# Altium PCB TX.PcbDoc (part 1 of 2)
Units mm, origin at the board's own origin, x right, y up, seen from the top; angles counter-clockwise.
Board outline 57 x 59.5 mm, 4 copper layers (Top Layer, Top Inner Layer, Bottom Inner Layer, Bottom Layer), stack 0.603 mm thick; 71 components, 52 nets, 363 pads, 52 vias.
Unrouted connection lines stored in the file: 5.
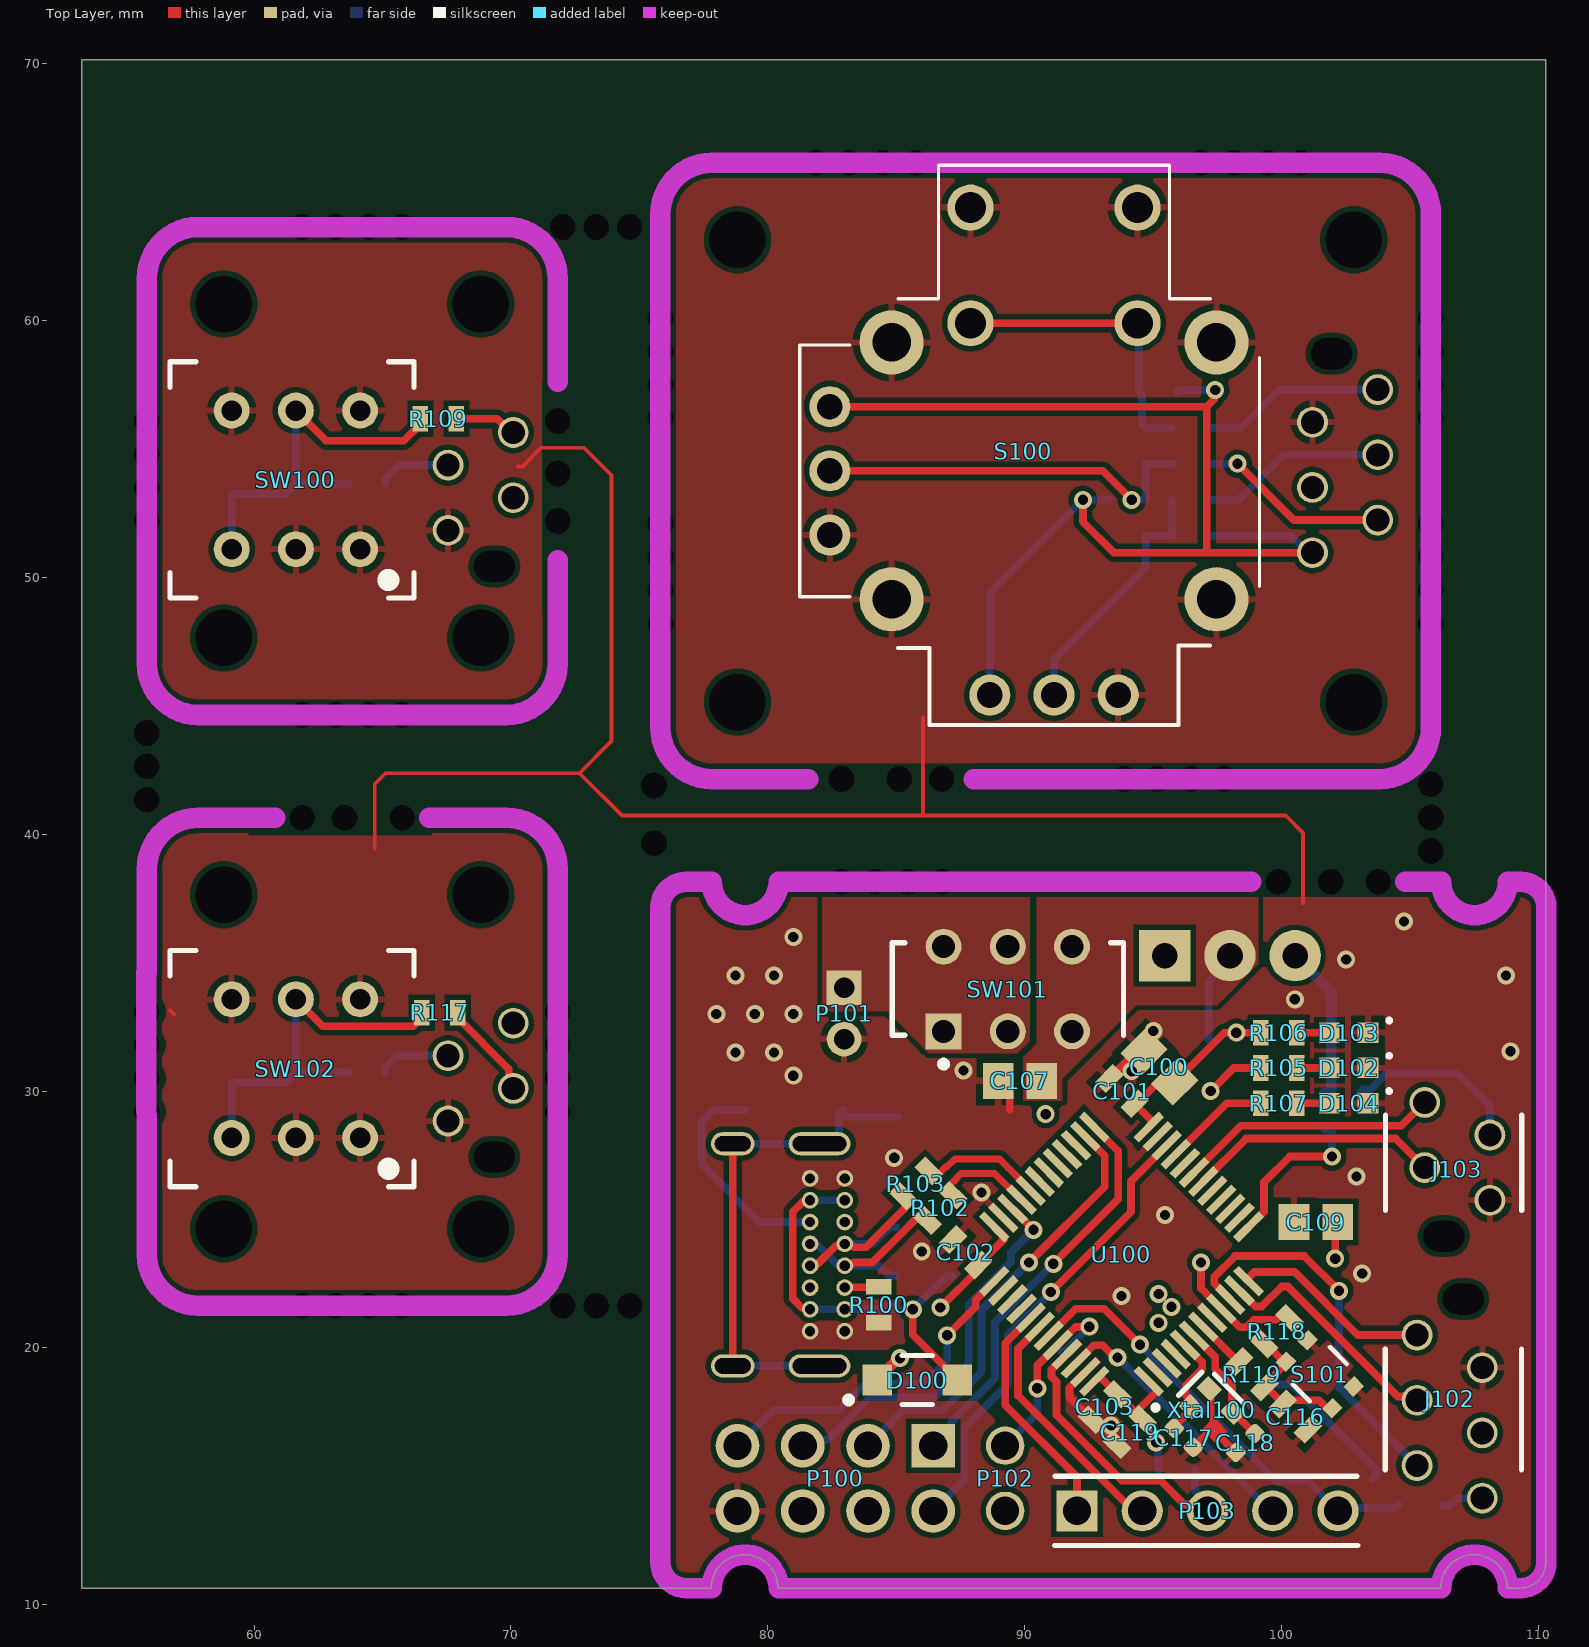
[diagram p0: Top Layer view]
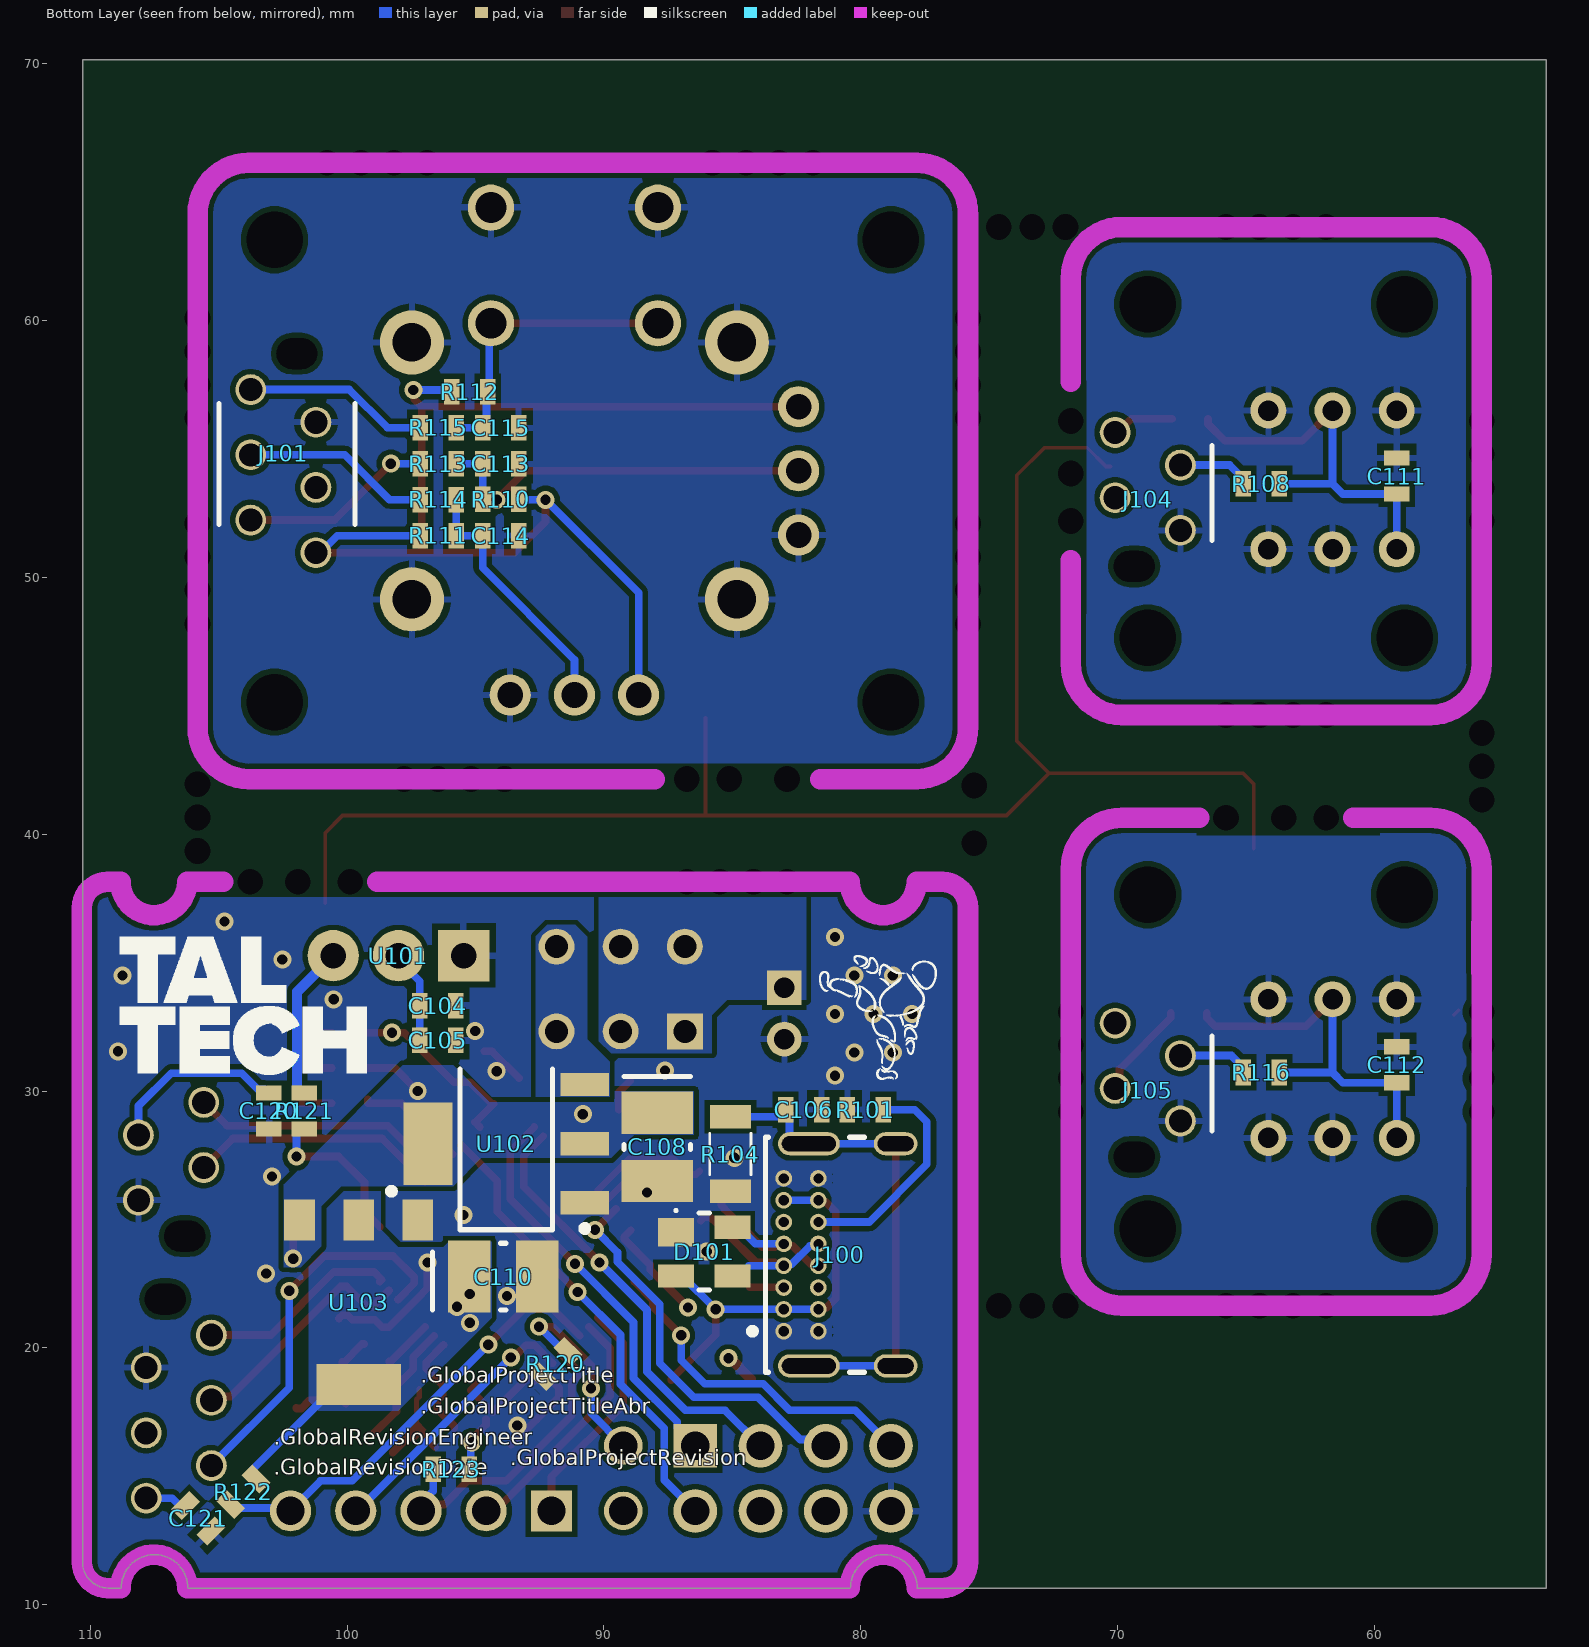
[diagram p1: Bottom Layer view, seen from below]
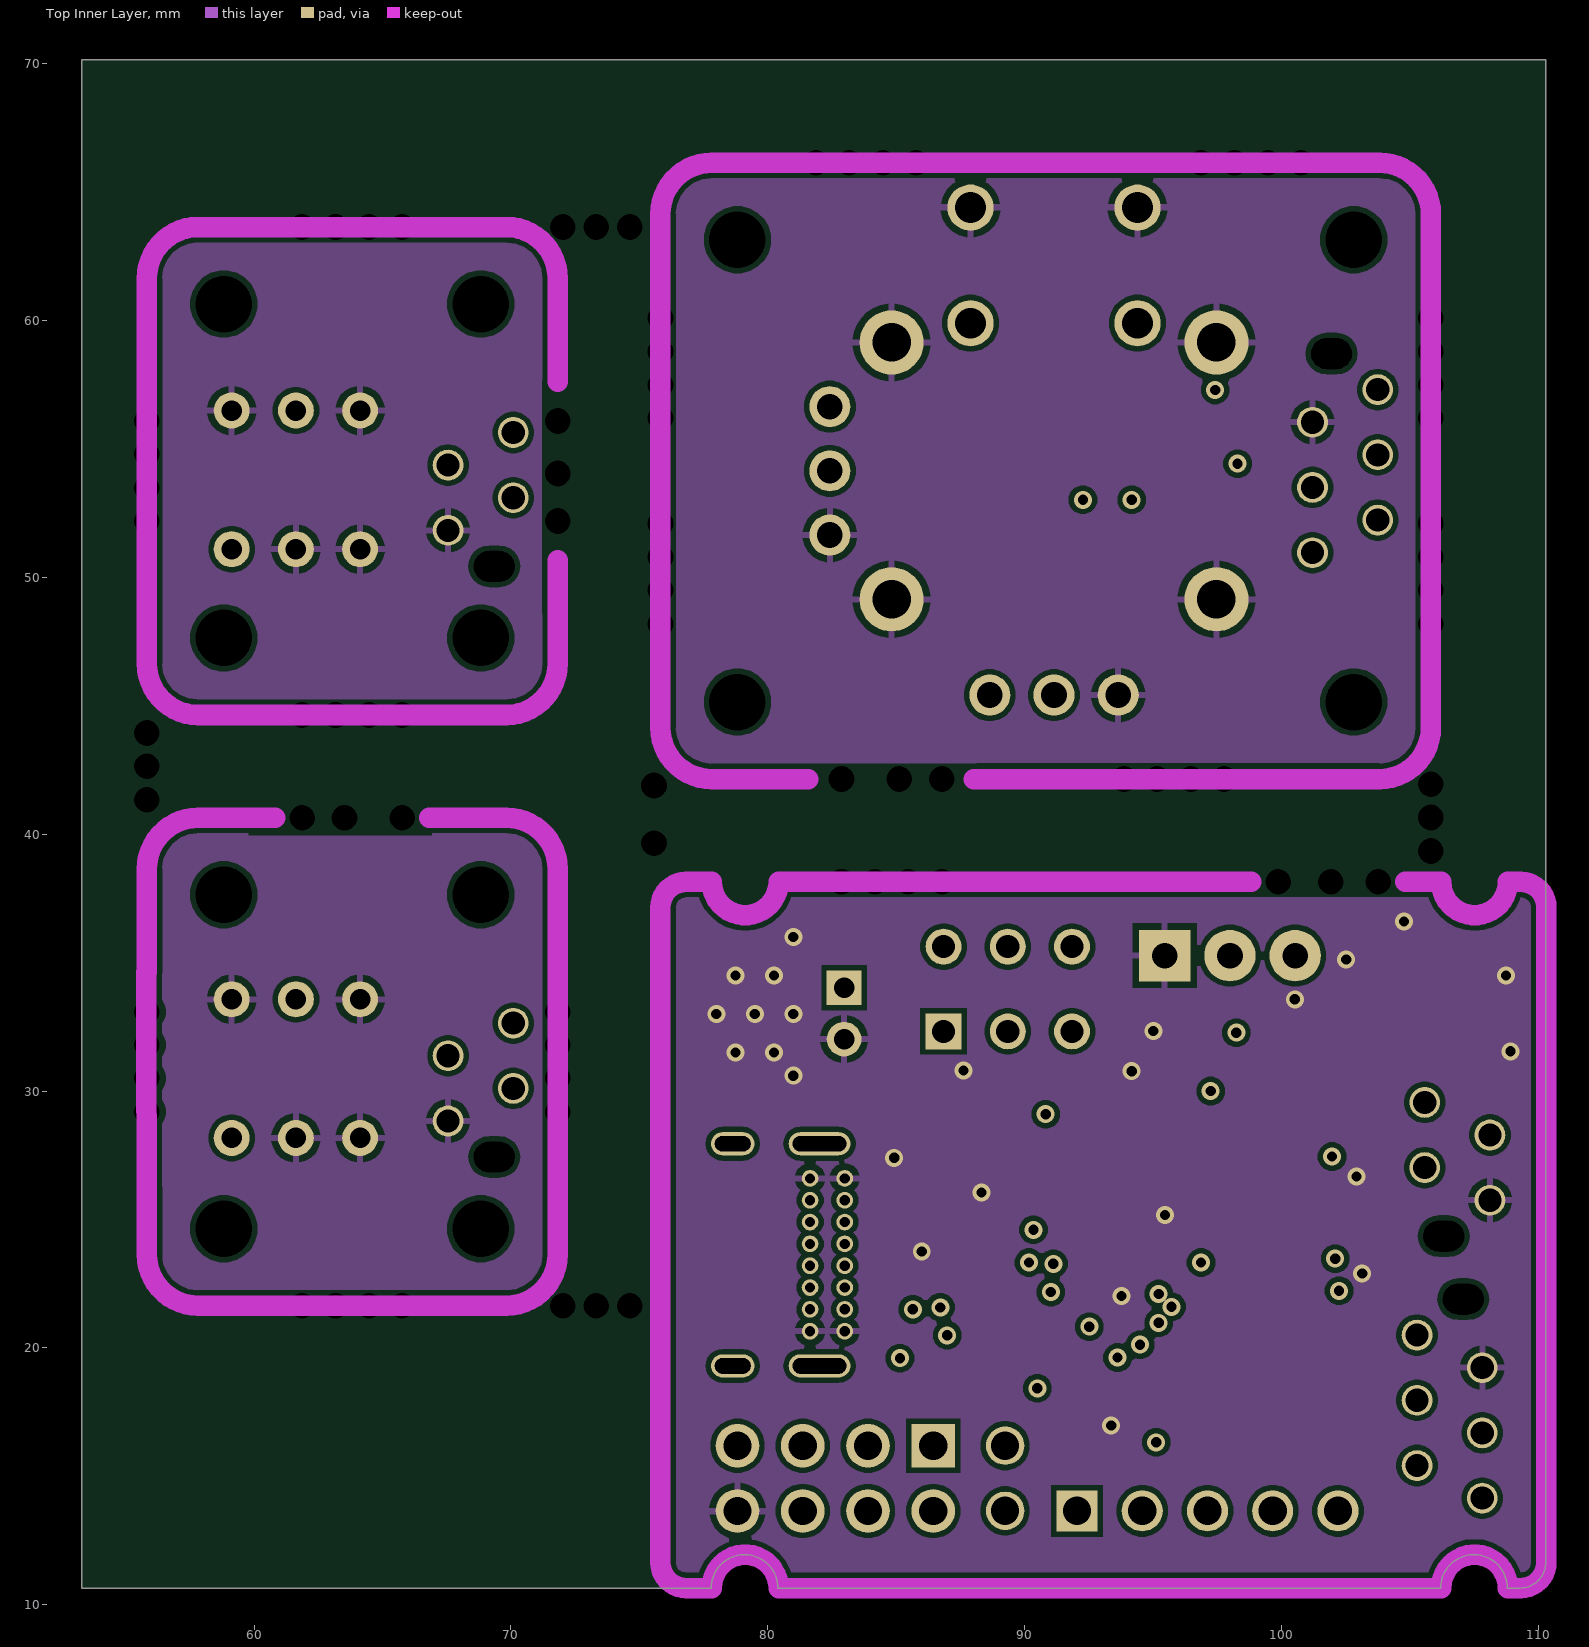
[diagram p2: Top Inner Layer]
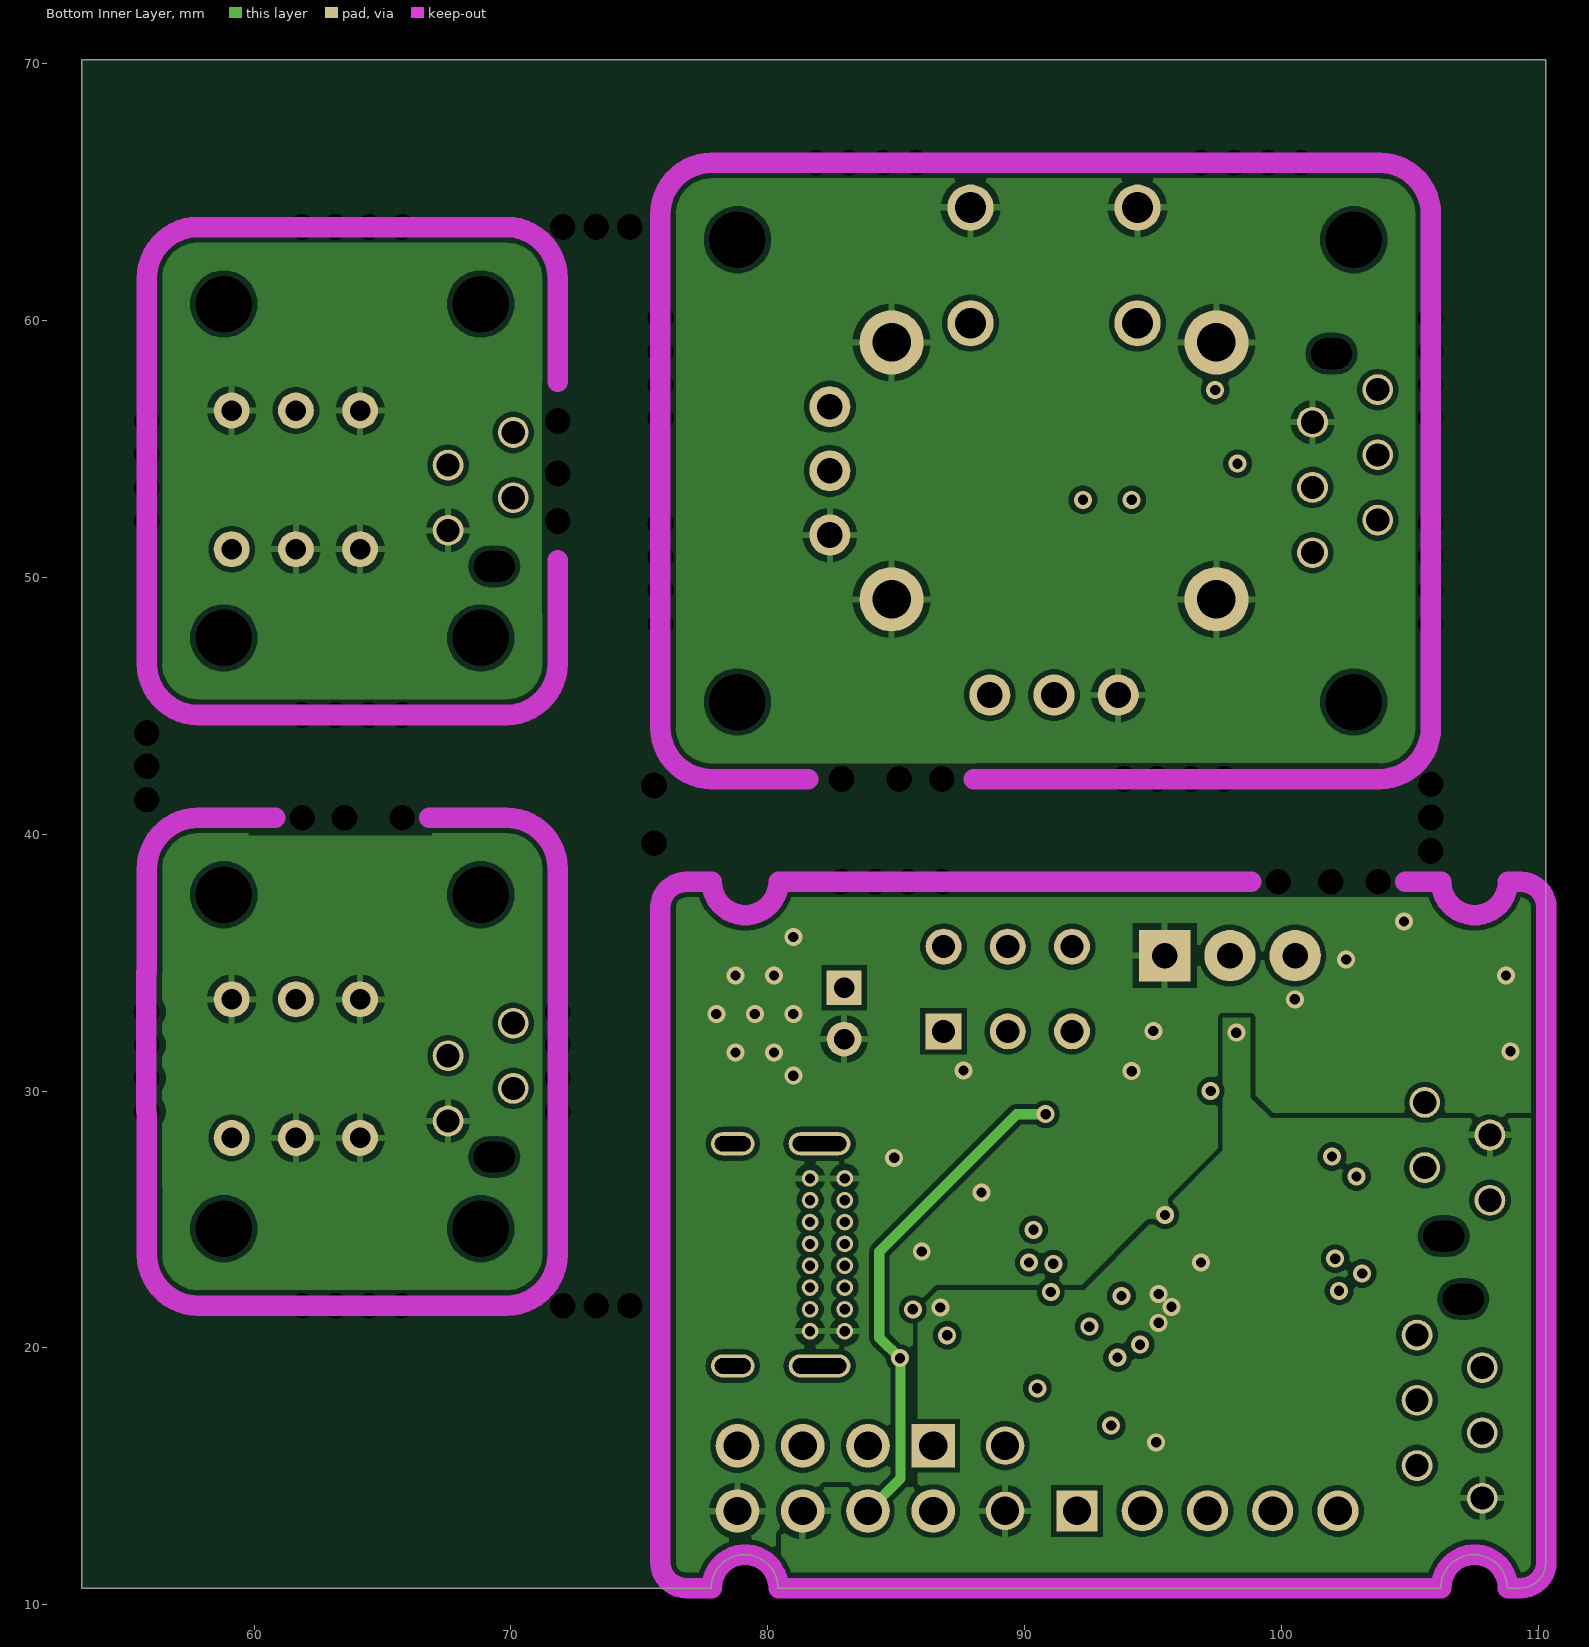
[diagram p3: Bottom Inner Layer]

## Layer stack, top to bottom
Top Solder: solder mask 0.0102, Solder Resist, Dk 3.5
Top Layer: signal copper 0.0356
Dielectric 2: prepreg 0.0711, PP-006, Dk 4.1
Top Inner Layer: signal copper 0.035
Dielectric 1: dielectric 0.32, FR-4, Dk 4.8
Bottom Inner Layer: signal copper 0.035
Dielectric 3: prepreg 0.0711, PP-006, Dk 4.1
Bottom Layer: signal copper 0.0356
Bottom Solder: solder mask 0.0102, Solder Resist, Dk 3.5

## Board outline
53.3,10.65 76.8,10.65 77.8,10.65 cw(c79.1,10.65) 80.4,10.65 106.2,10.65 cw(c107.5,10.65) 108.8,10.65 109.3,10.65 ccw(c109.3,11.65) 110.3,11.65 110.3,70.15 53.3,70.15

## Design rules (kind name [scope] priority, off if disabled: settings)
BoardOutlineClearance RouteToolBoard [(AsMM(HoleDiameter)=1) AND (AsMM(PadXSize_AllLayers)=0)] p1: gap=0 ignorepadtopadclearanceinfootprint=FALSE
BoardOutlineClearance BoardOutlineClearance_1 [All] p2: gap=0.254 ignorepadtopadclearanceinfootprint=FALSE except(0: Arc-SplitContinuation Track-SplitContinuation SMDPad-SplitContinuation THPad-SplitContinuation Via-SplitContinuation Fill-SplitContinuation Poly-SplitContinuation Region-SplitContinuation Text-SplitContinuation)
Clearance RouteToolClearance [All vs (AsMM(HoleDiameter)=1) AND (AsMM(PadXSize_AllLayers)=0)] p1: gap=0 ignorepadtopadclearanceinfootprint=FALSE
Clearance Clearance_1 [All] p2: gap=0.2 ignorepadtopadclearanceinfootprint=FALSE
ComponentClearance FS1000A [All vs InComponent('U101')] p1: gap=0 collisioncheckmode=3 verticalgap=0 showdistances=FALSE donotcheckwithout3dbody=TRUE
ComponentClearance [All] p2: gap=0.254 collisioncheckmode=3 verticalgap=0.254 showdistances=FALSE
DiffPairsRouting [All] p1: maxlimit=0.3 minlimit=0.127 mostfreqgap=0.127 toplayer_minwidth=0.12 toplayer_maxwidth=0.3 toplayer_prefwidth=0.12 midlayer1_maxgap=0.127 midlayer1_minwidth=0.111 midlayer1_maxwidth=0.111 midlayer1_prefwidth=0.111 midlayer2_maxgap=0.127 midlayer2_minwidth=0.111 midlayer2_maxwidth=0.111 midlayer2_prefwidth=0.111 bottomlayer_minwidth=0.12 bottomlayer_maxwidth=0.3 bottomlayer_prefwidth=0.12 impedanceprofiledriven=TRUE impedanceprofileid={F303A199-7218-468A-B388-033341A8378D} impedanceprofilevalue=90.000000 maxuncoupledlength=12.7
MinimumSolderMaskSliver [All] p1: minsoldermaskwidth=0
PolygonConnect MainPWR [IsNamedPolygon('Main')] p1: connectstyle=Direct reliefconductorwidth=1 reliefentries=2 polygonreliefangle="90 Angle" airgapwidth=0.254
PolygonConnect [All] p2: thpad.connectstyle=Relief thpad.reliefconductorwidth=0.254 thpad.reliefentries=4 thpad.polygonreliefangle="90 Angle" thpad.airgapwidth=0.254 smdpad.connectstyle=Relief smdpad.reliefconductorwidth=0.254 smdpad.reliefentries=4 smdpad.polygonreliefangle="90 Angle" smdpad.airgapwidth=0.254 via.connectstyle=Direct via.reliefconductorwidth=0.254 via.reliefentries=4 via.polygonreliefangle="90 Angle" via.airgapwidth=0.254
RoutingVias [All] p1: holewidth=0.3 width=0.5 viastyle="Through Hole" minholewidth=0.3 minwidth=0.5 maxholewidth=0.3 maxwidth=1 viatemplateguid#1={624E91B9-952A-4740-B797-111CA46E8F32} viatemplatename#1=v50h30
SilkToSolderMaskClearance [IsPad] p1: minsilkscreentomaskgap=0.1 clearancetoexposedcopper=TRUE
SolderMaskExpansion IsVia [IsVia] p1: expansion=0 istentingtop=FALSE soldermaskfromhole=TRUE
SolderMaskExpansion SolderMaskExpansion_1 [All] p2: expansion=0.102 istentingtop=FALSE
SupplyNets "Schematic Supply Nets_9" [InNet('SL_3V3')] p1: voltage=0.000
SupplyNets "Schematic Supply Nets_6" [InNet('J_3V3')] p2: voltage=0.000
SupplyNets "Schematic Supply Nets" [InNet('SR_3V3')] p3: voltage=0.000
SupplyNets "Schematic Supply Nets_5" [InNet('3V3')] p4: voltage=0.000
SupplyNets "Schematic Supply Nets_3" [InNet('5V')] p5: voltage=0.000
SupplyNets "Schematic Supply Nets_2" [InNet('7.4V')] p6: voltage=0.000
SupplyNets "Schematic Supply Nets_1" [InNet('GND')] p7: voltage=0.000
Width [All] p1: maxlimit=2 minlimit=0.15 preferedwidth=0.3 minimp=50.000000 maximp=50.000000 favimp=50.000000
26 further rules are at their usual default settings.

## Classes and differential pairs
differential pair D: +D_P -D_N
differential pair USB_D: +USB_D_P -USB_D_N

## Components (designator, comment, footprint, x,y, rotation, side; value= is the part's Value field where it differs from the comment)
C100 "4.7u" MLCC_0805_M 95.25,30.95 r315 top value=4.7µF
C101 "100n" MLCC_0603_M 93.8,30 r135 top value=100nF
C102 "100n" MLCC_0603_M 87.705,23.72 r135 top value=100nF
C103 "100n" MLCC_0603_M 93.125,17.7 r225 top value=100nF
C104 "1u" MLCC_0603_M 96.475,33.325 r0 bottom value=1µF
C105 "100n" MLCC_0603_M 96.475,31.975 r0 bottom value=100nF
C106 "1n" MLCC_0603_M 82.225,29.275 r0 bottom value=1nF
C107 "10u" MLCC_0805_M 89.825,30.4 r0 top value=10µF
C108 "TCJB226M025R0150" 1210_Tantalum 87.925,27.825 r270 bottom value=22µF
C109 "10u" MLCC_0805_M 101.35,24.9 r0 top value=10µF
C110 "TCJB226M025R0150" 1210_Tantalum 93.925,22.775 r180 bottom value=22µF
C111 "100n" MLCC_0603_M 59.13,53.95 r270 bottom value=100nF
C112 "100n" MLCC_0603_M 59.13,31.025 r270 bottom value=100nF
C113 "100n" MLCC_0603_M 94.025,54.425 r0 bottom value=100nF
C114 "100n" MLCC_0603_M 94.025,51.625 r0 bottom value=100nF
C115 "100n" MLCC_0603_M 94.025,55.825 r0 bottom value=100nF
C116 "100n" MLCC_0603_M 100.55,17.325 r135 top value=100nF
C117 "15p" MLCC_0402_M 96.2,16.5 r135 top value=15pF
C118 "15p" MLCC_0402_M 98.6,16.3 r45 top value=15pF
C119 "100n" MLCC_0603_M 94.1,16.725 r45 top value=100nF
C120 "100n" MLCC_0603_M 103.05,29.225 r90 bottom value=100nF
C121 "100n" MLCC_0603_M 105.795,13.37 r45 bottom value=100nF
D100 "MBR1020VL_R1_00001" FP-MBR1020VL_R1_00001-MFG 85.825,18.75 r0 top
D101 "SP0503BAHT" LFUS-SOT143-4_V 86.1,23.75 r180 bottom value=30pF
D102 "Red" "0603 RED LED" 102.625,30.9 r0 top
D103 "Red" "0603 RED LED" 102.625,32.275 r0 top
D104 "Red" "0603 RED LED" 102.625,29.525 r0 top
J100 "USB4085-GF-A" FP-USB4085-GF-A-MFG 78.975,23.625 r90 bottom locked
J101 "7-215079-6" 7-215079-6-Footprint-1 101.215,50.965 r90 bottom
J102 "7-215079-6" 7-215079-6-Footprint-1 107.825,14.15 r90 top
J103 "7-215079-4" 7-215079-4 105.585,29.56 r270 top
J104 "7-215079-4" 7-215079-4 70.095,55.645 r270 bottom
J105 "7-215079-4" 7-215079-4 70.095,32.645 r270 bottom
P100 "8 Pos Vertical Pin Header" "8 POS Vertical Pin Header" 82.635,14.92 r180 top
P101 "S2B-PH-K-S(LF)(SN)" B5B-PH-K-S(LF)(SN) 82.425,33.025 r270 top
P102 "PH1-02-UA" "2Pos Pin Header Vertical" 89.245,14.925 r90 top
P103 "61300511121" 61300511121 97.125,13.655 r0 top
R100 "5.1k" Resistor_0603_M 84.325,21.675 r270 top value=5,1k
R101 "5.1k" Resistor_0603_M 79.825,29.275 r180 bottom value=5,1k
R102 "22R" Resistor_0603_M 86.725,25.45 r45 top value=22
R103 "22R" Resistor_0603_M 85.775,26.4 r45 top value=22
R104 "1M" Resistor_1206_M 85.075,27.55 r90 bottom
R105 "200R" Resistor_0603_M 99.9,30.9 r0 top value=200
R106 "200R" Resistor_0603_M 99.9,32.275 r0 top value=200
R107 "200R" Resistor_0603_M 99.9,29.525 r0 top value=200
R108 "10k" Resistor_0603_M 64.405,53.65 r0 bottom
R109 "100R" Resistor_0603_M 67.18,56.175 r0 top value=100
R110 "10k" Resistor_0603_M 94.025,53.05 r180 bottom
R111 "10k" Resistor_0603_M 96.45,51.625 r0 bottom
R112 "10k" Resistor_0603_M 95.225,57.225 r0 bottom
R113 "100R" Resistor_0603_M 96.45,54.425 r0 bottom value=100
R114 "100R" Resistor_0603_M 96.45,53.025 r0 bottom value=100
R115 "100R" Resistor_0603_M 96.45,55.825 r0 bottom value=100
R116 "10k" Resistor_0603_M 64.405,30.725 r0 bottom
R117 "100R" Resistor_0603_M 67.23,33.05 r0 top value=100
R118 "10k" Resistor_0603_M 99.825,20.65 r45 top
R119 "100R" Resistor_0603_M 98.85,18.975 r135 top value=100
R120 "10k" Resistor_0603_M 91.9,19.375 r135 bottom
R121 "22R" Resistor_0603_M 101.675,29.225 r270 bottom value=22
R122 "4.7k" Resistor_0603_M 104.05,14.4 r135 bottom value=4,7k
R123 "4.7k" Resistor_0603_M 95.95,15.275 r180 bottom value=4,7k
S100 "THB001P" THB001P 91.15,54.15 r0 top value=10kR
S101 "USLPT2819DT4TR" USLPT2819DT4TR-Footprint-1 101.5,18.975 r315 top
SW100 "TL2201EEXB" TL2201EEXB-Footprint-1 61.63,53.8 r180 top
SW101 "JS202011CQN" FP-JS202011CQN-MFG 89.35,33.975 r0 top
SW102 "TL2201EEXB" TL2201EEXB-Footprint-1 61.63,30.875 r180 top
U100 "STM32F103C6T6A" STM-LQFP48_M 93.775,23.65 r135 top
U101 "FS1000A" "2.54mm 3-pin horizontal" 98,40.475 r0 bottom
U102 "AMS1117-5.0" SOT230P700X180-4N 93.8,27.95 r0 bottom
U103 "AMS1117-3.3" "SOT-223 based on ZVP2110GTA" 99.55,21.775 r270 bottom
Xtal100 "ABM11-16.000MHZ-12-N1G-T" FP-ABM11-MFG 97.3,17.6 r315 top

## Footprints (in the part's own frame and the unit in brackets; to place one, negate y for a bottom-side part, rotate by r counter-clockwise, add the part's x,y. Pads: shape width x height; smd on the part's side, far side on the other; paste and mask are expansions set on the pad)
"2.54mm 3-pin horizontal" [mm]
  rect 2x2 hole 1: 1(-2.54,5.2)
  round 2 hole 1: 2(0,5.2) 3(2.54,5.2)
"2Pos Pin Header Vertical" [mm]
  round 1.5 hole 1.1: 1(-1.27,0) 2(1.27,0)
  body extent -2.55,-1.25 2.54,1.25, height 7.25
7-215079-4 [mm]
  round 0 hole 1.2 slot 1.6 at 90 deg unplated: 0(5.21,0.74)
  round 1.2 hole 0.9: 1(0,0) 2(1.27,2.54) 3(2.54,0) 4(3.81,2.54)
  silkscreen extent 0.5,-1.53 4.2,3.77, body extent -1.62,-1.39 5.42,3.61, height 4
7-215079-6-Footprint-1 [mm]
  round 0 hole 1.2 slot 1.6 at 90 deg unplated: 0(7.75,0.74)
  round 1.2 hole 0.9: 1(0,0) 2(1.27,2.54) 3(2.54,0) 4(3.81,2.54) 5(5.08,0) 6(6.35,2.54)
  silkscreen extent 1.1,-1.53 5.8,3.77, body extent -1.6,-1.38 7.96,3.62, height 4
"8 POS Vertical Pin Header" [mm]
  rect 1.7x1.7 hole 1.1: 1(-3.81,-1.27)
  round 1.7 hole 1.1: 2(-3.81,1.27) 3(-1.27,-1.27) 4(-1.27,1.27) 5(1.27,-1.27) 6(1.27,1.27) 7(3.81,-1.27) 8(3.81,1.27)
  body extent -5.08,-2.51 5.08,2.49, height 8.03
"0603 RED LED" [mm] "Generic 0603 RED LED"
  rect 0.8x0.8 smd: 1(0.75,0) 2(-0.75,0)
  silkscreen extent 1.55,0.45 1.6,0.5, body extent -0.8,-0.4 0.8,0.4, height 0.4
1210_Tantalum [mm] "Chip Capacitor, 2-Leads, Body 3,20x2,50mm, IPC Medium Density"
  rect 1.65x2.8 smd: 1(-1.325,0) 2(1.325,0)
  silkscreen extent -2.75,-1.3 0.1,1.3, body extent -1.85,-1.43 1.85,1.5, height 2.06
61300511121 [mm] "Pin Header, pitch 2.54 mm, THT, Vertical, single row, 5p"
  rect 1.6x1.6 hole 1.1: 1(-5.08,0)
  round 1.6 hole 1.1: 2(-2.54,0) 3(0,0) 4(2.54,0) 5(5.08,0)
  silkscreen extent -5.95,-1.35 5.85,1.35, body extent -6.35,-1.27 6.35,1.27, height 8.57
B5B-PH-K-S(LF)(SN) [mm]
  rect 1.35x1.35 hole 0.8: 1(-1,0.55)
  round 1.35 hole 0.8: 2(1,0.55)
  body extent -2.92,-5.73 2.98,1.87, height 4.8
FP-ABM11-MFG [mm]
  rect 0.75x0.65 smd paste+0 mask+0: 1(-0.65,-0.5) 3(0.65,0.5) 4(-0.65,0.5)
  round 0.025 smd paste+0 mask+0: 2(0.65,-0.525)
  Top Layer region: 0.275,-0.325 0.425,-0.175 1.025,-0.175 1.025,-0.825 0.275,-0.825
  silkscreen extent -1.31,-0.53 0.65,1.04, body extent -1.18,-0.97 1.18,0.97, height 0.25
FP-JS202011CQN-MFG [mm]
  rect 1.4x1.4 hole 0.9 paste-2539.97 mask+0: 1(-2.5,-1.65)
  round 1.4 hole 0.9 paste-2539.97 mask+0: 2(0,-1.65) 3(2.5,-1.65) 4(2.5,1.65) 5(0,1.65) 6(-2.5,1.65)
  silkscreen extent -4.5,-3.05 4.5,1.8, body extent -4.6,-2.45 4.6,2.45, height 0.25
FP-MBR1020VL_R1_00001-MFG [mm]
  rect 1.15x1.22 smd paste+0 mask+0: 1(-1.55,0) 2(1.55,0)
  silkscreen extent -2.8,-0.95 0.6,0.95, body extent -2.22,-1.05 2.22,1.05, height 0.25
FP-USB4085-GF-A-MFG [mm]
  rrect100% 0.9x2.4 hole 2.1 slot 0.6 at 0 deg paste-2539.97 mask+0: 1(-4.325,3.045) 2(4.325,3.045)
  rrect100% 0.9x1.7 hole 1.4 slot 0.6 at 0 deg paste-2539.97 mask+0: 3(-4.325,-0.335) 4(4.325,-0.335)
  round 0.65 hole 0.4 paste-2539.97 mask+0: A1(-2.975,4.025) A4(-2.125,4.025) A5(-1.275,4.025) A6(-0.425,4.025) A7(0.425,4.025) A8(1.275,4.025) A9(2.125,4.025) A12(2.975,4.025) B1(2.975,2.675) B4(2.125,2.675) B5(1.275,2.675) B6(0.425,2.675) B7(-0.425,2.675) B8(-1.275,2.675) B9(-2.125,2.675) B12(-2.975,2.675)
  silkscreen extent -4.57,0.89 4.57,5.37, body extent -4.51,-4.6 4.51,4.57, height 3.46
LFUS-SOT143-4_V [mm] "SOT143, 4-Leads, Body 3.04x1.4mm, Pitch 1.90mm"
  rect 1.4x1.1 smd: 1(-1.1,0.75)
  rect 1.4x0.9 smd: 2(-1.1,-0.95) 3(1.1,-0.95) 4(1.1,0.95)
  silkscreen extent -1.15,-1.5 0.2,1.65, body extent -0.7,-1.52 0.7,1.52, height 1.22
MLCC_0402_M [mm]
  rrect49% 0.63x0.61 smd: 1(-0.525,0) 2(0.525,0)
  body extent -0.5,-0.25 0.5,0.25, height 0.55
MLCC_0603_M [mm]
  rect 0.6x1 smd: 1(-0.7,0) 2(0.7,0)
  body extent -0.8,-0.4 0.8,0.4, height 0.92
MLCC_0805_M [mm] "Chip Capacitor, 2-Leads, Body 2,00x1,25mm, IPC Medium Density"
  rect 1.2x1.4 smd: 1(-0.85,0) 2(0.85,0)
  body extent -1.05,-0.67 1.05,0.67, height 1.35
Resistor_0603_M [mm]
  rect 0.6x1 smd: 1(-0.7,0) 2(0.7,0)
  body extent -0.8,-0.4 0.8,0.4, height 0.45
Resistor_1206_M [mm]
  rect 0.9x1.6 smd: 1(-1.45,0) 2(1.45,0)
  silkscreen extent -0.8,-0.8 0.8,0.8, body extent -1.6,-0.83 1.6,0.83, height 0.56
SOT230P700X180-4N [mm] "SOT-223 based on AP2114H-3.3TRG1"
  rect 1.9x0.9 smd: 1(-3.05,2.3) 2(-3.05,0) 3(-3.05,-2.3)
  rect 1.9x3.2 smd: 4(3.05,0)
  silkscreen extent -3.17,-2.9 1.8,3.42, body extent -3.5,-3.35 3.5,3.35, height 1.8
"SOT-223 based on ZVP2110GTA" [mm] "SOT-223 based on ZVP2110GTA"
  rect 1.6x1.2 smd: 1(-3.2,2.3) 2(-3.2,0) 3(-3.2,-2.3)
  rect 1.6x3.3 smd: 4(3.2,0)
  silkscreen extent -4.45,1.15 -4.2,1.4, body extent -3.5,-3.25 3.5,3.25, height 1.8
STM-LQFP48_M [mm] "QFP, 48-Leads, Body 7x7mm, Pitch 0.5mm, IPC Low Density"
  rect 1.4x0.3 smd: 1(-4.25,2.75) 2(-4.25,2.25) 3(-4.25,1.75) 4(-4.25,1.25) 5(-4.25,0.75) 6(-4.25,0.25) 7(-4.25,-0.25) 8(-4.25,-0.75) 9(-4.25,-1.25) 10(-4.25,-1.75) 11(-4.25,-2.25) 12(-4.25,-2.75) 25(4.25,-2.75) 26(4.25,-2.25) 27(4.25,-1.75) 28(4.25,-1.25) 29(4.25,-0.75) 30(4.25,-0.25) 31(4.25,0.25) 32(4.25,0.75) 33(4.25,1.25) 34(4.25,1.75) 35(4.25,2.25) 36(4.25,2.75)
  rect 0.3x1.4 smd: 13(-2.75,-4.25) 14(-2.25,-4.25) 15(-1.75,-4.25) 16(-1.25,-4.25) 17(-0.75,-4.25) 18(-0.25,-4.25) 19(0.25,-4.25) 20(0.75,-4.25) 21(1.25,-4.25) 22(1.75,-4.25) 23(2.25,-4.25) 24(2.75,-4.25) 37(2.75,4.25) 38(2.25,4.25) 39(1.75,4.25) 40(1.25,4.25) 41(0.75,4.25) 42(0.25,4.25) 43(-0.25,4.25) 44(-0.75,4.25) 45(-1.25,4.25) 46(-1.75,4.25) 47(-2.25,4.25) 48(-2.75,4.25)
  silkscreen extent -5.26,3.19 -5.06,3.39, body extent -3.5,-3.5 3.5,3.5, height 1.6
THB001P [mm]
  round 1.8 hole 1.2: B1A(-3.25,10.25) B1B(3.25,10.25) B2A(-3.25,5.75) B2B(3.25,5.75)
  round 1.6 hole 1: H1(-2.5,-8.73) H2(0,-8.73) H3(2.5,-8.73) V1(-8.73,2.5) V2(-8.73,0) V3(-8.73,-2.5)
  round 2.5 hole 1.5: S1(-6.325,5) S2(-6.325,-5) S3(6.325,-5) S4(6.325,5)
  silkscreen extent -9.9,-9.9 8,11.9, body extent -9.67,-9.67 7.6,11.6, height 19.5
TL2201EEXB-Footprint-1 [mm]
  round 1.4 hole 0.8: 1(-2.5,2.7) 2(0,2.7) 3(2.5,2.7) 4(-2.5,-2.7) 5(2.5,-2.7) 6(0,-2.7)
  silkscreen extent -4.6,-4.6 4.9,4.6, body extent -4.25,-4.25 4.55,4.25, height 14.2
USLPT2819DT4TR-Footprint-1 [mm]
  rect 0.55x0.6 smd: 1(-1.275,0.6) 2(1.275,0.6) 3(-1.275,-0.59) 4(1.275,-0.59)
  silkscreen extent -0.46,-1.02 0.46,1.03, body extent -1.5,-0.94 1.5,0.96, height 0.43

## Part data
C100: library part CMP-001-1830-1, "MLCC, 0805, 4.7u, 20%, 50V, X5R", Capacitor Type=Ceramic, Case/Package=0805, Dielectric=X5R, Manufacturer=Any, Tolerance=20%, Voltage=50V, Mount=SMD, Part number="MLCC, 0805, 4.7u, 20%, 50V, X5R", RoHS=Yes
C101 C102 C103 C105 C111 C112 C113 C114 C115 C116 C119 C120 C121: library part CMP-001-0815-1, "MLCC, 0603, 100n, 10%, 50V, X7R", Capacitor Type=Ceramic, Case/Package=0603, Dielectric=X7R, Manufacturer=Any, Tolerance=10%, Voltage=50V, Mount=SMD, Part number="MLCC, 0603, 100n, 10%, 50V, X7R", RoHS=Yes
C104: library part CMP-001-0565-1, "MLCC, 0603, 1u, 10%, 50V, X5R", Capacitor Type=Ceramic, Case/Package=0603, Dielectric=X5R, Manufacturer=Any, Tolerance=10%, Voltage=50V, Mount=SMD, Part number="MLCC, 0603, 1u, 10%, 50V, X5R", RoHS=Yes
C106: library part CMP-001-0786-1, "MLCC, 0603, 1n, 10%, 50V, X7R", Capacitor Type=Ceramic, Case/Package=0603, Dielectric=X7R, Manufacturer=Any, Tolerance=10%, Voltage=50V, Mount=SMD, Part number="MLCC, 0603, 1n, 10%, 50V, X7R", RoHS=Yes
C107 C109: library part CMP-001-0829-2, "MLCC, 0805, 10u, 10%, 50V, X5R", Capacitor Type=Ceramic, Case/Package=0805, Dielectric=X5R, Manufacturer=Any, Tolerance=10%, Voltage=50V, Mount=SMD, Part number="MLCC, 0805, 10u, 10%, 50V, X5R", RoHS=Yes
C108 C110: library part CMP-0001-00036-4, "Cap Tant Solid 22uF 25V B CASE 20% (3.5 X 2.8 X 1.9mm) SMD 3528-21 0.15 Ohm 105°C T/R", Capacitance=22uF, Capacitor Type=Molded, Case Code (Imperial)=1210, Case Code (Metric)=3528, Dielectric=X5R, ESR (Equivalent Series Resistance)=150mR, Manufacturer="AVX Corporation", Max Operating Temperature=105°C, Min Operating Temperature=-55°C, Package Quantity=2000, Tolerance=20%, Voltage Rating=25V, Case/Package=1210, Depth=2.8mm, Features="General Purpose", Height=1.9mm, Height - Seated (Max)=0.083inch, Length=0.138inch, Life (Hours)=2000Hour, Mount="Surface Mount", Packaging="Tape and Reel", Part number=TCJB226M025R0150, Radiation Hardening=No, REACH SVHC="No SVHC", RoHS=Yes, Termination=SMD/SMT, Voltage Rating (DC)=25V, Width=0.11inch
C117 C118: library part CMP-001-1853-1, "MLCC, 0402, 15p, 10%, 25V, C0G/NP0", Capacitance=15pF, Capacitor Type=Ceramic, Case Code (Imperial)=0402, Case Code (Metric)=1005, Dielectric=C0G, Manufacturer=Any, Max Operating Temperature=125°C, Min Operating Temperature=-55°C, Package Quantity=1, Temperature Coefficient=300ppm/°C, Tolerance=10%, Voltage=25V, Voltage Rating=25, Case/Package=0402, Contact Plating=Tin, Depth=0.5mm, Height=0.5mm, Length=1mm, Material=Ceramic, Mount="Surface Mount", Packaging="Tape and Reel", Part number="MLCC, 0402, 15p, 10%, 25V, C0G/NP0", Radiation Hardening=No, RoHS=Yes, Thickness=0.022inch, Width=0.02inch
D100: library part CMP-ROOT-01310-1, "Rectifier Diode, Schottky, 1 Phase, 1 Element, 1A, 20V V(RRM), Silicon", Case/Package=SOD-123FL, Forward Current=1A, Manufacturer=Panjit, Max Forward Surge Current (Ifsm)=45A, Max Junction Temperature (Tj)=125°C, Max Repetitive Reverse Voltage (Vrrm)=20V, Min Operating Temperature=-55°C, Peak Reverse Current=600µA, Height=1.1mm, Lifecycle Status=Production, Max Operating Temperature=125°C, Max Output Current=1A, Mount=SMD, Number of Elements=1, Number of Terminals=2, Part number=MBR1020VL_R1_00001, Pins=2, REACH SVHC=No, Reverse Standoff Voltage=20V, RoHS=Compliant
D101: library part CMP-ROOT-01259-1, "SP050xBA Series 8.5 V 30 pF Triple Uni-Directional TVS Avalanche Diode-SOT143-4", Breakdown Voltage=5.5V, Case/Package=SOT-143, Clamping Voltage=6.8V, Leakage Current=100nA, Manufacturer="Littelfuse Inc.", Max Operating Temperature=125°C, Max Power Dissipation=225mW, Min Operating Temperature=-40°C, Power Line Protection=No, Voltage Rating (DC)=5V, China RoHS=Compliant, Composition=Zener, Depth=1.4mm, Diode Type=Avalanche, Direction=Unidirectional, Element Configuration="Common Anode", ESD Protection=Yes, Height=1.22mm, Lead Free="Lead Free", Length=3.04mm, Lifecycle Status=Production, Max Reverse Leakage Current=100nA, Mount=SMD, Mounting Technology="Surface Mount", Number of Channels=3, Number of Elements=3, Number of Terminals=4, Number of Unidirectional Channels=3, Operating Supply Voltage=5.5V, Part number=SP0503BAHT, Peak Pulse Power=225mW, Pins=4, Polarity=Unidirectional, Power Dissipation=225mW, Radiation Hardening=No, REACH SVHC=Yes, Reverse Standoff Voltage=5.5V, RoHS=Compliant, Schedule B="8536300000, 8536300000", Termination=SMD/SMT, Width=1.4mm, Working Voltage=5.5V
D102 D103 D104: library part CMP-ROOT-00025-2, "Generic red 0603 LED", Case/Package=0603, Manufacturer=Any, Part number="Any Red 0603 LED", Color=Red, Mount=SMD, RoHS=Yes
J100: library part CMP-001-1800-1, "USB Connector, 16 Contact(s), Female, Right Angle, Solder Terminal, Locking, Receptacle", Current Rating=4.25A, Flammability Rating="UL94 V-0", Insulation Color=Black, Manufacturer=GCT, Max Operating Temperature=85°C, Min Operating Temperature=-40°C, Part number=USB4800-03-A, Voltage Rating=20V, Connector Type=USB, Contact Material="Copper Alloy", Contact Plating=Gold, Gender=Receptacle, Height=3.66mm, Mating Cycles=10000, Mount=TH, Mounting Technology="Through Hole,Horizontal", Number of Contacts=16, Number of Ports=1, Number of Positions=16, Orientation="Right Angle", Packaging="Tape and Reel", Pins=16, RoHS=Yes, Series=USB4085, Shielding=Shielded, Standoff Height=3.5mm, Termination=Solder, USB PD=3.2, USB Standard="USB 2.0"
J101 J102: library part CMP-ROOT-01311-2, "Conn FFC Connector F 6 POS 1.27mm Solder ST Thru-Hole Automotive Box/Carton", Color=Red, Contact Current Rating=1A, Contact Resistance=10mΩ, Insulation Resistance=1GΩ, Manufacturer="TE Connectivity", Manufacturer Lifecycle Status=ACTIVE, Max Operating Temperature=105°C, Min Operating Temperature=-40°C, Operating Force=4.8928N, Operating Supply Voltage=100V, China RoHS=Compliant, Contact Gender=Female, Contact Material="Nickel, Tin", Contact Plating=Tin, Current Rating=1A, Height=4.2mm, Housing Color=Red, Insulation Material=Thermoplastic, Lead Free="Lead Free", Lead Pitch=1.27mm, Length=9.7mm, Lifecycle Status=Production, Mating Connector Lock=Without, Mount=TH, Mounting Technology="Through Hole", Number of Contacts=6, Number of Ports=1, Number of Positions=6, Number of Rows=2, Orientation=Vertical, Packaging=Box, Part number=7-215079-6, PCB Mount Retention=With, Pins=6, Plating Thickness=4.99999µm, REACH SVHC=Yes, RoHS=Compliant, Row Spacing=2.54mm, Shielding=No, Terminal Pitch=1.27mm, Voltage Rating=100V, Voltage Rating (DC)=100V
J103 J104 J105: library part CMP-ROOT-01314-1, "Conn FFC Connector F 4 POS 1.27mm Solder ST Thru-Hole Box/Carton", Color=Red, Contact Current Rating=1A, Contact Resistance=10mΩ, Insulation Resistance=1GΩ, Manufacturer="TE connectivity", Manufacturer Lifecycle Status=ACTIVE, Max Operating Temperature=105°C, Min Operating Temperature=-40°C, Operating Force=4.8928N, Operating Supply Voltage=100V, Part number=7-215079-6, China RoHS=Compliant, Contact Gender=Female, Contact Material="Nickel, Tin", Contact Plating=Tin, Current Rating=1A, Gender=Female, Height=4.2mm, Housing Color=Red, Insulation Material=Thermoplastic, Lead Pitch=1.27mm, Length=7.0866mm, Lifecycle Status=Production, Mating Connector Lock=Without, Mount=TH, Mounting Technology="Through Hole", Number of Contacts=4, Number of Ports=1, Number of Positions=4, Number of Rows=2, Orientation=Vertical, Packaging=Box, PCB Mount Retention=With, Pins=4, Plating Thickness=4.99999µm, REACH SVHC=Yes, RoHS=Compliant, Row Spacing=2.54mm, Shielding=No, Terminal Pitch=1.27mm, Voltage Rating=100V, Voltage Rating (DC)=100V
P100: library part CMP-ROOT-00235-2, "Connector Header Through Hole 8 position 0.100\" (2.54mm)", Color=Black, Current Rating=3A, Insulation Resistance=5GR, Manufacturer="Amphenol ICC (FCI)", Max Operating Temperature=125°C, Max Voltage Rating (AC)=1.5kV, Min Operating Temperature=-65°C, Package Quantity=100, Part number=67997-208HLF, Connector Type="Male Pin", Contact Gender=Male, Contact Material=Bronze, Contact Mating Length=0.23inch, Contact Plating=Gold,GXT, Contact Post Length=3.05mm, Depth=4.83mm, Gender=Male, Housing Color=Black, Housing Material=Thermoplastic, Length=10.16mm, Mount="Through Hole", Number of Contacts=8, Number of Positions=8, Number of Rows=2, Orientation=Straight, Packaging=Bulk, Pins=8, Pitch=2.54mm, Radiation Hardening=No, REACH SVHC="No SVHC", RoHS=Yes, Row Spacing=0.1inch, Termination=Solder, Voltage Rating=1.5kV
P101: library part CMP-ROOT-00728-2, "Conn Shrouded Header (4 Sides) HDR 2 POS 2mm Solder RA Thru-Hole Box", Color=Natural,White, Contact Resistance=20mR, Current Rating=2A, Flammability Rating="UL94 V-0", Housing Color=White, Insulation Resistance=1GR, Manufacturer="JST Sales America Inc.", Max Operating Temperature=85°C, Max Voltage Rating (AC)=100V, Min Operating Temperature=-25°C, Connector Type="Male Pin", Contact Material=Tin,Brass,Bronze, Contact Mating Length=0.13inch, Contact Plating=Tin,Copper, Contact Type="Male Pin", Depth=7.6mm, Fastening Type=Detent, Gender=Male, Height=9.4mm, Housing Material=Polyamide, Lead Free="Lead Free", Lead Pitch=2mm, Length=5.9mm, Max Current Rating=2A, Max Voltage Rating (DC)=100V, Mount="Through Hole", Number of Contacts=2, Number of Pins=2, Number of Poles=2, Number of Positions=2, Number of Rows=1, Orientation="Right Angle", Packaging=Bulk, Part number=S2B-PH-K-S(LF)(SN), Pitch=2mm, REACH SVHC="No SVHC", RoHS=Yes, Series=PH, Termination=Solder, Voltage Rating=100V, Voltage Rating (AC)=100V, Width=4.5mm, Working Voltage=100V
P102: library part CMP-002-000007-1, "Conn Unshrouded Header HDR 2 POS 2.54mm Solder ST Top Entry Thru-Hole Bag", Contact Resistance=20mΩ, Current Rating=3A, Insulation Resistance=5GΩ, Manufacturer="Adam Tech", Part number=PH1-04-UA, Voltage Rating=250V, Contact Gender=Male, Contact Material=Brass, Contact Plating=Gold, Height=9.2456mm, Housing Material=PBT, Lead Free="Lead Free", Lifecycle Status=Production, Mount=TH, Number of Contacts=2, Number of Positions=2, Number of Rows=1, Pins=2, Pitch=2.54mm, REACH SVHC=Yes, RoHS=Compliant, Schedule B="8536694040, 8536694040", Terminal Pitch=2.54mm, Termination=Solder
P103: library part CMP-ROOT-01020-1, "Conn Unshrouded Header HDR 5 POS 2.54mm Solder ST Top Entry Thru-Hole Bag", Manufacturer=Wurth, Mount=TH, Part number=61300511121, RoHS=Yes
R100 R101: library part CMP-001-0094-2, "Resistor, 0603, 5.1k, 1%, 1/10W", Case/Package=0603, Manufacturer=Any, Power=100mW, Tolerance=1%, Mount=SMD, Part number="Resistor, 0603, 5.1k, 1%, 1/10W", RoHS=Yes
R102 R103 R121: library part CMP-001-0038-3, "Resistor, 0603, 22R, 1%, 1/10W", Case/Package=0603, Manufacturer=Any, Power=100mW, Tolerance=1%, Mount=SMD, Part number="Resistor, 0603, 22R, 1%, 1/10W", RoHS=Yes
R104: library part CMP-0001-00051-1, "Resistor, 1206, 1M, 1%, 1/4W", Case/Package=1206, Manufacturer=Any, Mount=SMD, Part number=Any, RoHS=Yes
R105 R106 R107: library part CMP-001-0060-2, "Resistor, 0603, 200R, 1%, 1/10W", Case/Package=0603, Manufacturer=Any, Power=100mW, Tolerance=1%, Mount=SMD, Part number="Resistor, 0603, 200R, 1%, 1/10W", RoHS=Yes
R108 R110 R111 R112 R116 R118: library part CMP-001-0101-2, "Resistor, 0603, 10k, 1%, 1/10W", Case/Package=0603, Manufacturer=Any, Power=100mW, Tolerance=1%, Mount=SMD, Part number="Resistor, 0603, 10k, 1%, 1/10W", RoHS=Yes
R109 R113 R114 R115 R117 R119: library part CMP-001-0054-5, "Resistor, 0603, 100R, 1%, 1/10W", Case/Package=0603, Manufacturer=Any, Power=100mW, Tolerance=1%, Mount=SMD, Part number="Resistor, 0603, 100R, 1%, 1/10W", RoHS=Yes
R120: library part CMP-0001-00257-1, "Resistor, 0603, 10k, ≤5%, ≥1/16W", Case/Package=0603, Manufacturer=Any, Mount=SMD, Part number="Resistor, 0603, 10k, ≤5%, ≥1/16W", RoHS=Yes
R122 R123: library part CMP-001-0093-2, "Resistor, 0603, 4.7k, 1%, 1/10W", Case/Package=0603, Manufacturer=Any, Power=100mW, Tolerance=1%, Mount=SMD, Part number="Resistor, 0603, 4.7k, 1%, 1/10W", RoHS=Yes
S100: library part CMPL-001-A00000-7, "Multi-Directional Thumbstick, 2 Axis, Center Momentary Switch, 12VDC, THB Series", Manufacturer=Littelfuse, Max Operating Temperature=70°C, Min Operating Temperature=-10°C, Operating Force=715gf, Package=None, Voltage Rating (DC)=12V, Actuator Type=Joystick, Mount=TH, Mounting Technology="Through Hole", Part number=THB001P, Pins=12, Price=None, RoHS=Yes, Termination="PC Pin"
S101: library part CMP-ROOT-01290-1, "Keypad Switch, SPST, 0.05A, 1.96N, Solder Terminal, Panel Mount", Case/Package=Non-standard, Color=Black, Contact Current Rating=50mA, Manufacturer="TE Connectivity ALCOSWITCH Switches", Max Operating Temperature=85°C, Min Operating Temperature=-40°C, Operating Force=1.96N, China RoHS=Compliant, Contact Material="Stainless Steel", Contact Plating=Silver, Housing Material=Polyethylene, Lifecycle Status=Production, Max Current Rating=50mA, Mount=SMD, Packaging="Tape & Reel", Part number=USLPT2819DT4TR, REACH SVHC=Yes, RoHS=Compliant, Throw Configuration=SPST
SW100 SW102: library part CMP-ROOT-01258-1, "Pushbutton Switch, DPDT, ON-ON, 100 mA, 30V DC, PC Pin, TL2201 Series", Case/Package=Non-standard, Contact Resistance=100mΩ, Current Rating=100mA, Insulation Resistance=100MΩ, Manufacturer=E-Switch, Max Voltage Rating (DC)=30V, Actuator Length=5.5118mm, Actuator Material=Acetal, Contact Plating=Silver, Electrical Life=10kcycles, Height=8.509mm, Length=8.509mm, Lifecycle Status=Production, Max Current Rating=100mA, Mount=TH, Mounting Technology="Through Hole", Number of Positions=2, Part number=TL2201EEXB, Pins=6, REACH SVHC=Yes, RoHS=Compliant, Switch Function=On-On, Termination="PC Pin", Throw Configuration=DPDT, Voltage Rating (DC)=30V
SW101: library part CMP-ROOT-01260-4, "Slide Switch, 1 Positions, Dpdt, Latched, 0.3A, 6Vdc, 6 Pcb Hole Cnt, Solder Terminal, Through", Case/Package=Non-standard, Color=Black, Contact Current Rating=300mA, Contact Resistance=70mΩ, Flammability Rating="UL94 V-0", Insulation Resistance=100MΩ, Manufacturer=C&K, Max Operating Temperature=85°C, Max Voltage Rating (DC)=6V, Min Operating Temperature=-40°C, Actuator Length=2.0066mm, Actuator Material=Nylon, Contact Plating=Silver, Current Rating=300mA, Depth=3.6mm, Electrical Life=5kcycles, Height=3.5mm, Housing Material=Nylon, Illumination Type=Non-Illuminated, Lead Free="Lead Free", Length=9mm, Life (Cycles)=5kcycles, Lifecycle Status=Production, Max Current Rating=300mA, Mount=SMD, Mounting Technology="Through Hole", Number of Positions=1, Orientation=Vertical, Packaging=Bulk, Part number=JS202011CQN, Pins=6, Radiation Hardening=No, REACH SVHC=Yes, RoHS=Compliant, Switch Function=On-On, Switch Travel=2mm, Terminal Material=Brass, Termination="PC Pins", Throw Configuration=DPDT, Voltage Rating (DC)=6V
U100: library part CMP-00012-1, "MCU 32-bit STM32F ARM Cortex M3 RISC 32KB Flash 2.5V/3.3V 48-Pin LQFP Tray", Case/Package=LQFP, Clock Frequency=16MHz, Frequency=72MHz, Manufacturer=STMicroelectronics, Max Operating Temperature=85°C, Max Power Dissipation=363mW, Max Supply Current=45mA, Max Supply Voltage=3.6V, Min Operating Temperature=-40°C, Min Supply Voltage=2V, Nominal Supply Current=1.55µA, Operating Supply Voltage=3.3V, Part number=STM32F103C8T6, Address Bus Width=32b, China RoHS=Compliant, Core Architecture=ARM, Data Bus Width=32b, Flash Memory Size=32kB, Height=1.45mm, Interface="CAN, I2C, IrDA, LIN, SPI, UART, USART, USB", Lead Free="Lead Free", Length=7mm, Lifecycle Status=Production, Memory Format=FLASH, Memory Size=32kB, Mount=SMD, Number of A/D Converters=2, Number of ADC Channels=10, Number of Channels=10, Number of I2C Channels=1, Number of I/Os=37, Number of Programmable I/O=37, Number of SPI Channels=1, Number of Terminals=48, Number of Timers/Counters=3, Number of USART Channels=2, Oscillator Type=Internal, Peripherals="DMA, I2C, POR, PWM, Temp Sensor, WDT", Pins=48, Radiation Hardening=No, RAM Size=10kB, REACH SVHC=Yes, RoHS=Compliant, Schedule B=8542310000, Terminal Pitch=500µm, Watchdog Timer=Yes, Width=7mm
U101: library part CMP-ROOT-01261-3, "FS1000A 433MHZ RF transmitter & XY-MK-5V Receiver Module", Case/Package=Non-standard, Manufacturer=-, Mount=SMD, Part number=FS1000A, Pins=3, RoHS=Yes
U102: library part CMP-00014-1, "LDO Regulator Pos 5V 1A 4-Pin(3+Tab) SOT-223 / 1A LOW DROPOUT VOLTAGE REGULATOR", Case/Package=SOT-223, Current Output=1A, Manufacturer=EVVO, Voltage Dropout (Max)="1.3V @ 1A", Voltage Input (Max)=12V, Voltage Output (Mix/Fixed)=5V, Mount=SMD, Output Type=Fixed, Part number=AMS1117-5.0, REACH SVHC=Yes, RoHS=Compliant
U103: library part CMP-00009-1, "Gull Wing EAR99 Fixed Positive Single Output Ldo Regulator Dual Voltage Regulator Linear 125C 1.2W 1A 1.8MM", Case/Package=SOT-223, Dropout Voltage=1.1V, Manufacturer="Shenzhen Slkormicro Semicon Co., Ltd.", Max Junction Temperature (Tj)=125°C, Max Power Dissipation=1.2W, Max Supply Voltage=15V, Min Operating Temperature=-40°C, Nominal Supply Current=5mA, Output Current=1A, Output Voltage=3.3V, Height=1.8mm, Max Operating Temperature=125°C, Mount=SMD, Number of Outputs=1, Part number=AMS1117-3.3, Pins=2, RoHS=Compliant
Xtal100: library part CMP-ROOT-01254-3, "Crystal 16MHz ±10ppm (Tol) ±15ppm (Stability) 12pF FUND 150Ohm 4-Pin Ultra Mini-CSMD T/R", Case/Package="4-SMD, No Lead", ESR (Equivalent Series Resistance)=150Ω, Frequency=16MHz, Frequency Stability=15ppm, Frequency Tolerance=0.001%, Load Capacitance=12pF, Manufacturer="Abracon LLC", Max Operating Temperature=85°C, Min Operating Temperature=-30°C, China RoHS=Compliant, ESR=150Ω, Height=590µm, Length=2mm, Lifecycle Status=Production, Mount=SMD, Mounting Technology="Surface Mount", REACH SVHC=Yes, RoHS=Compliant, Schedule B=8541600080, Tolerance=0.001%, Width=1.6mm

## Free pads (board coordinates)
  rect 0x0 hole 2.2 unplated: 2(68.825,60.645) 2(68.825,37.645) 3(58.825,60.645) 3(58.825,37.645) 4(68.825,47.645) 4(68.825,24.645) 5(58.825,47.645) 5(58.825,24.645) 10(102.825,45.15) 11(102.825,63.15) 12(78.825,63.15) 13(78.825,45.15)
  rect 0x0 hole 1 unplated: 14(55.825,41.345) 14(55.825,42.645) 14(55.825,43.945) 14(55.825,52.195) 14(55.825,53.495) 14(55.825,54.795) 14(55.825,56.095) 14(55.825,29.195) 14(55.825,30.495) 14(55.825,31.795) 14(55.825,33.095) 14(61.875,40.645) 14(61.875,44.645) 14(61.875,63.645) 14(61.875,21.645) 14(63.175,44.645) 14(63.175,63.645) 14(63.175,21.645) 14(63.525,40.645) 14(64.475,44.645) 14(64.475,63.645) 14(64.475,21.645) 14(65.775,40.645) 14(65.775,44.645) 14(65.775,63.645) 14(65.775,21.645) 14(71.825,29.195) 14(71.825,30.495) 14(71.825,31.795) 14(71.825,33.095) 14(71.825,52.195) 14(71.825,54.045) 14(71.825,56.095) 14(72.025,21.645) 14(72.025,63.645) 14(73.325,21.645) 14(73.325,63.645) 14(74.625,21.645) 14(74.625,63.645) 14(75.575,39.648) 14(75.575,41.898) 14(75.825,48.2) 14(75.825,49.5) 14(75.825,50.8) 14(75.825,52.1) 14(75.825,56.2) 14(75.825,57.5) 14(75.825,58.8) 14(75.825,60.1) 14(81.875,66.15) 14(82.875,42.15) 14(82.875,38.15) 14(83.175,66.15) 14(84.175,38.15) 14(84.475,66.15) 14(85.125,42.15) 14(85.475,38.15) 14(85.775,66.15) 14(86.775,42.15) 14(86.775,38.15) 14(93.875,42.15) 14(95.175,42.15) 14(96.475,42.15) 14(96.875,66.15) 14(97.775,42.15) 14(98.175,66.15) 14(99.475,66.15) 14(99.875,38.15) 14(100.775,66.15) 14(101.925,38.15) 14(103.775,38.15) 14(105.825,39.35) 14(105.825,40.65) 14(105.825,41.95) 14(105.825,48.2) 14(105.825,49.5) 14(105.825,50.8) 14(105.825,52.1) 14(105.825,56.2) 14(105.825,57.5) 14(105.825,58.8) 14(105.825,60.1)

## Via types
v1: diameter 0.7, hole 0.4, Top Layer to Bottom Layer, 52 vias

## Nets (pads, with @x,y where several pads share a name; then routed paths per layer and width w, separated by ;. In a path a pad name is that pad's centre, name@x,y a point inside that pad or via, vN(x,y) a via of type N, cw(c..) or ccw(c..) an arc to the next point about the centre after c; other vN are vias at no path point)
3V3: C100.2 C101.1 C102.1 C103.1 C110.1 C119.2 C120.2 C121.2 J102.1 J103.2 P100.6 P102.1 R106.1 R118.2 R122.2 R123.2 U100.1 U100.9 U100.24 U100.36 U100.48 U103.2 U103.4 | length 37.6
  Top Layer w0.3: v1(86.725,21.575) 88.2,23.05 C102.1 89.214,24.239 89.214,24.322 U100.36@88.953,24.583 ; U100.48 92.915,18.9 C103.1 94.325,17.49 95.185,18.35 U100.1 ; C119.2 94.595,17.008 94.998,16.604 94.998,16.477 v1@95.075,16.4 ; U100.24 95.018,28.782 C101.1 94.371,29.505 95.215,30.349 C100.2 97.427,31.925 97.777,32.275 v1(98.25,32.275) R106.1 ; v1(96.875,23.325) 96.875,22.318 97.275,21.918 U100.9 98.053,21.14 98.385,20.808 98.633,20.808 98.925,21.1 99.8,21.1 99.976,21.276 100.189,21.276 R118.2
  Bottom Layer w0.3: v1(95.13,16.326) 95.19,16.266 95.19,15.305 R123.2@95.25,15.245 ; U103.4 100.4,18.575 101.05,17.925 101.05,17.895 103.696,15.249 103.696,15.036 R122.2 ; C120.2 103.2,30.075 103.475,30.075 104.1,30.7 106.85,30.7 108.125,29.425 J103.2 ; C121.2 106.305,13.85 106.517,13.85 106.817,14.15 J102.1
  other v1: 95.225,20.975 95.725,21.6 95.225,22.1
5V: C108.1 C109.2 D100.1 P100.4 R105.1 U102.2 U102.4 U103.3 | length 24.7
  Top Layer w0.3: v1(97.25,30) 98.15,30.9 R105.1 ; v1(102.1,23.475) 102.1,24.8 C109.2
  Top Layer w0.4: D100.1 84.275,18.785 85.09,19.6 v1(85.15,19.6)
  Bottom Inner Layer w0.4: P100.4 85.175,14.92 85.175,19.575 84.35,20.4 84.35,23.75 89.7,29.1 v1(90.825,29.1)
7.4V: C104.2 C105.2 C107.2 SW101.3 SW101.4 U101.2 U102.3 | length 3.6
  Bottom Layer w0.3: C105.2 C104.2 97.175,34.275 98,35.1 U101.2
BAT_+: P101.1 SW101.1 SW101.2 SW101.5 SW101.6
BOOT: P102.2 R120.2 U100.44 | length 7.8
  Top Layer w0.3: v1(90.5,18.425) 90.5,19.314 U100.44 92.002,20.816 92.516,20.816 v1(92.525,20.825)
  Bottom Layer w0.3: P102.2 90.5,17.45 v1(90.5,18.425) ; R120.2 91.57,19.87 v1(92.525,20.825)
D_N: D101.4 J100.A7 J100.B7 R103.1 | length 7.6
  Top Layer w0.3: J100.B7 81.717,23.267 81.942,23.267 82.658,23.983 82.933,23.983 J100.A7 83.067,23.983 83.293,23.983 83.351,23.925 83.83,23.925 84.635,24.73 84.635,24.734 85.313,25.412 85.313,25.443 85.421,25.551 85.421,25.764 R103.1
  Bottom Layer w0.3: J100.A7 84.1,24.05 84.75,24.7 D101.4
D_P: D101.3 J100.A6 J100.B6 R102.1 | length 7.9
  Top Layer w0.3: J100.A6 83.067,23.267 83.293,23.267 83.351,23.325 84.078,23.325 85.235,24.482 85.235,24.486 85.737,24.988 85.768,24.988 85.876,25.096 86.089,25.096 R102.1
  Bottom Layer w0.3: J100.B6 81.717,23.983 81.973,23.983 82.689,23.267 82.933,23.267 J100.A6 84.35,23.2 84.75,22.8 D101.3
D_SCL: P103.3 R123.1 U100.45 | length 12
  Top Layer w0.3: U100.45 91.05,19.157 91.05,18.875 91.25,18.675 91.25,17.375 93.8,14.825 95.3,14.825 96.221,13.904 96.876,13.904 P103.3
  Bottom Layer w0.3: R123.1 96.65,14.431 97.125,13.956 P103.3
D_SDA: P103.5 R122.1 U100.43 | length 17.4
  Top Layer w0.3: U100.43 92.004,21.525 93.1,21.525 93.825,20.8 v1(94.5,20.125)
  Bottom Layer w0.3: v1(94.5,20.125) 99.8,14.825 101.035,14.825 P103.5 102.314,13.764 104.404,13.764 R122.1
DBG_LED: R107.1 U100.21 | length 4.3
  Top Layer w0.3: U100.21 97.882,29.525 R107.1 R107.1@99.2,29.681
EN: R119.2 U100.7 | length 2
  Top Layer w0.3: U100.7 98.309,19.47 R119.2
GND: C100.1 C101.2 C102.2 C103.2 C104.1 C105.1 C106.1 C107.1 C108.2 C109.1 C110.2 C111.1 C112.1 C113.1 C114.1 C115.1 C116.1 C117.1 C118.1 C119.1 C120.1 C121.1 D101.1 D102.1 D103.1 D104.1 J100.A1 J100.A12 J100.B1 J100.B12 J101.5 J102.5 J103.4 J104.4 J105.4 P100.8 P101.2 pad.14@55.825,29.195 pad.14@55.825,30.495 pad.14@55.825,31.795 pad.14@55.825,33.095 pad.14@75.575,39.648 R100.2 R101.1 R104.1 R120.1 S100.B1A S100.B1B S100.H3 S100.S1 S100.S2 S100.S3 S100.S4 S100.V3 S101.1 S101.2 SW100.1 SW100.2 SW100.4 SW100.5 SW102.1 SW102.2 SW102.4 SW102.5 U100.8 U100.23 U100.35 U100.47 U101.1 U102.1 U103.1 Xtal100.2 Xtal100.4 | length 74
  Top Layer w0.15: 56.73,33.15 56.905,32.975 ; 64.7,39.45 64.7,41.952 65.123,42.375 72.675,42.375 ; 70.28,54.325 70.455,54.325 71.18,55.05 72.853,55.05 73.925,53.978 73.925,43.625 72.675,42.375 ; 86.05,44.525 86.05,40.725 ; 100.85,37.325 100.85,40.05 100.175,40.725 86.05,40.725 ; 72.675,42.375 74.325,40.725 86.05,40.725
  Top Layer w0.2: Xtal100.4 97.194,18.095 97.3,17.989 97.3,16.858 Xtal100.2
  Top Layer w0.3: C107.1 89.425,29.95 89.425,29.275 ; U100.47 91.75,18.443 91.75,18.085 C103.2 C119.1 ; C101.2 94.361,31.551 C100.1 ; C117.1 97.212,16.769 Xtal100.2 C118.1
  other v1: 93.375,16.975 93.775,22.025 103.15,22.9 86,23.75 95.475,25.175 88.325,26.05 102.925,26.675 84.925,27.4 81,30.6 94.175,30.775 87.625,30.8 78.75,31.5 80.25,31.5 108.925,31.55 95.015,32.337 78,33 79.5,33 81,33 100.525,33.575 78.75,34.5 80.25,34.5 108.75,34.5 102.525,35.125 81,36 104.775,36.6
J_3V3: J101.1 R110.2 R111.2 R112.2 S100.H1 S100.V1 | length 47.5
  Top Layer w0.3: S100.V1 97.1,56.65 ; v1(92.275,53.025) 92.275,52.175 93.485,50.965 97.1,50.965 ; v1(97.425,57.3) 97.387,57.262 97.387,56.937 97.1,56.65 ; J101.1 97.1,50.965 ; 97.1,50.965 97.1,56.65
  Bottom Layer w0.3: S100.H1 88.65,49.4 v1(92.275,53.025) 93.3,53.025 R110.2 ; R112.2 96,57.3 v1(97.425,57.3) ; R111.2 100.39,51.625 101.05,50.965 J101.1
JOY_H: J102.4 U100.11 | length 9.3
  Top Layer w0.3: U100.11 98.992,21.615 99.24,21.615 100.013,22.388 100.262,22.388 104.545,18.105 105.14,18.105 J102.4
JOY_SEL: J102.6 U100.12 | length 8.2
  Top Layer w0.3: U100.12 98.654,22.66 98.954,22.96 100.515,22.96 102.975,20.5 J102.6@105.59,20.5
JOY_V: J102.2 U100.10 | length 15
  Top Layer w0.3: U100.10 97.387,22.513 97.387,22.762 98.2,23.575 100.9,23.575 v1(102.25,22.225)
  Bottom Layer w0.3: v1(102.25,22.225) 102.25,18.455 J102.2
JOYH: J101.4 R114.2 | length 7.3
  Bottom Layer w0.3: R114.2 98.35,53.025 100.1,54.775 J101.4
JOYSEL: J101.6 R115.2 | length 7.2
  Bottom Layer w0.3: R115.2 98.425,55.825 99.915,57.315 J101.6
JOYV: J101.2 R113.2 | length 7.5
  Top Layer w0.3: v1(98.298,54.431) 100.494,52.235 J101.2
  Bottom Layer w0.3: R113.2 97.156,54.431 v1(98.298,54.431)
NetC106_2: C106.2 J100.1 J100.2 J100.3 J100.4 R104.2 | length 19.7
  Top Layer w0.3: J100.3 J100.4
  Bottom Layer w0.3: J100.3 J100.1 ; J100.4 J100.2 82.498,27.95 82.775,28.227 82.775,29.125 C106.2 82.925,29.15 83.075,29 R104.2
NetC111_2: C111.2 R108.1 R109.1 SW100.3 SW100.6 | length 15.5
  Top Layer w0.3: SW100.6 62.805,55.325 65.83,55.325 66.48,55.975 R109.1
  Bottom Layer w0.3: SW100.3 C111.2 61.23,53.25 61.63,53.65 ; SW100.6 61.63,53.65 ; R108.1 61.63,53.65
NetC112_2: C112.2 R116.1 R117.1 SW102.3 SW102.6 | length 15.4
  Top Layer w0.3: SW102.6 62.68,32.525 66.205,32.525 66.53,32.85 R117.1
  Bottom Layer w0.3: SW102.3 C112.2 61.23,30.325 61.63,30.725 ; SW102.6 61.63,30.725 ; R116.1 61.63,30.725
NetC113_2: C113.2 R110.1 R113.1 S100.V2 | length 15.2
  Top Layer w0.3: S100.V2 93.05,54.15 v1(94.175,53.025)
  Bottom Layer w0.3: v1(94.175,53.025) 94.7,53.025 R110.1 C113.2 R113.1
NetC114_2: C114.2 R111.1 R114.1 S100.H2 | length 10.1
  Bottom Layer w0.3: S100.H2 91.15,46.8 94.725,50.375 C114.2 R111.1 R114.1
NetC115_2: C115.2 R112.1 R115.1 S100.B2A S100.B2B | length 11.7
  Top Layer w0.3: S100.B2A S100.B2B
  Bottom Layer w0.3: S100.B2B 94.462,59.837 94.462,57.287 R112.1 94.575,57.175 94.575,55.975 C115.2 R115.1
NetC116_2: C116.2 R118.1 R119.1 S101.3 S101.4 | length 5.5
  Top Layer w0.3: R118.1 99.408,20.155 S101.3@100.178,19.385 ; S101.3@100.178,19.384 99.345,18.552 R119.1 99.42,18.48 100.055,17.845 C116.2 100.196,17.961 101.467,17.961 101.79,17.639 101.967,17.639 S101.4 ; S101.3@100.178,19.459 S101.3
NetC117_2: C117.2 U100.5 Xtal100.1 | length 4.1
  Top Layer w0.3: C117.2 95.829,16.96 96.487,17.618 Xtal100.1 96.487,17.954 96.275,18.165 96.275,18.55 96.92,19.195 96.92,19.444 U100.5
NetC118_2: C118.2 U100.6 Xtal100.3 | length 4.8
  Top Layer w0.3: U100.6 97.425,19.646 97.425,19.175 98.078,18.522 98.078,17.529 Xtal100.3 98.131,17.494 98.954,16.671 C118.2
NetD100_2: D100.2 D101.2 J100.A4 J100.A9 J100.B4 J100.B9 | length 16.1
  Top Layer w0.3: J100.B9 81.583,21.567 81.333,21.567 80.975,21.925 80.975,25.3 81.358,25.683 81.583,25.683 J100.B4 ; v1(85.65,21.5) 85.65,20.51 87.375,18.785 D100.2
  Bottom Layer w0.3: J100.B4@81.555,25.75 J100.A9 ; J100.B9 v1(85.65,21.5) 86.95,22.8 D101.2
NetD102_2: D102.2 R105.2 | length 1.3
  Top Layer w0.3: R105.2 D102.2
NetD103_2: D103.2 R106.2 | length 1.3
  Top Layer w0.3: R106.2 D103.2
NetD104_2: D104.2 R107.2 | length 1.3
  Top Layer w0.3: R107.2 D104.2
NetJ100_A5: J100.A5 R100.1 | length 1.3
  Top Layer w0.3: J100.A5 83.013,22.363 84.312,22.363 R100.1
NetJ100_B5: J100.B5 R101.2 | length 8.7
  Bottom Layer w0.3: R101.2 77.9,29.275 77.425,28.8 77.425,27.15 79.675,24.9 J100.B5
NetR121_1: R121.1 U101.3 | length 6.2
  Bottom Layer w0.4: U101.3 101.95,33.865 101.95,30.025 101.85,29.925 R121.1
PB5: P103.1 U100.41 | length 9.1
  Top Layer w0.3: U100.41 89.25,20.186 89.25,17.775 92.045,14.98 P103.1
PB6: P103.2 U100.42 | length 9.7
  Top Layer w0.3: U100.42 89.75,19.979 89.75,18.138 94.233,13.655 P103.2
PB9: P103.4 U100.46 | length 10.6
  Top Layer w0.3: U100.46 92.7,20.1 93.042,20.1 93.517,19.625 v1(93.625,19.625)
  Bottom Layer w0.3: v1(93.625,19.625) 99.595,13.655 P103.4
PB11: P100.2 U100.22 | length 18
  Top Layer w0.3: v1(91.025,22.175) 94.15,25.3 94.15,26.5 U100.22
  Bottom Layer w0.3: P100.2 87.65,14.855 87.65,16.875 89.357,18.582 89.357,20.507 v1(91.025,22.175)
PB12: P100.1 U100.25 | length 15.8
  Top Layer w0.3: v1(91.125,23.275) 93.65,25.8 93.65,27.664 U100.25
  Bottom Layer w0.3: P100.1 87.145,16.89 87.145,17.12 88.85,18.825 88.85,21 v1(91.125,23.275)
PB13: P100.3 U100.26 | length 17.1
  Top Layer w0.3: v1(90.175,23.325) 93.125,26.275 93.125,27.482 U100.26
  Bottom Layer w0.3: P100.3 85.29,17.575 86.825,17.575 88.325,19.075 88.325,21.475 v1(90.175,23.325)
RF_DATA: R121.2 U100.13 | length 6.3
  Top Layer w0.3: U100.13 99.325,25.311 99.325,26.45 100.325,27.45 v1(101.975,27.45)
  Bottom Layer w0.3: R121.2 101.825,28.525 101.975,28.375 v1(101.975,27.45)
SL_3V3: J104.2 R108.2 | length 2.9
  Bottom Layer w0.3: R108.2 65.105,53.85 65.63,54.375 J104.2
SR_3V3: J105.2 R116.2 | length 2.8
  Bottom Layer w0.3: R116.2 65.105,30.925 65.563,31.383 J105.2@67.555,31.383
SW_L: J103.1 U100.19 | length 10.1
  Top Layer w0.3: U100.19 98.421,28.65 104.675,28.65 J103.1
SW_R: J103.3 U100.18 | length 9.8
  Top Layer w0.3: U100.18 98.629,28.15 104.455,28.15 J103.3
SWCLK: P100.7 U100.37 | length 13.4
  Top Layer w0.3: v1(86.992,20.492) 88.1,21.6 88.1,21.864 U100.37
  Bottom Layer w0.3: P100.7 80.21,17.575 82.775,17.575 83.8,18.6 86.075,18.6 86.992,19.517 v1(86.992,20.492)
SWDIO: P100.5 U100.34 | length 15.2
  Top Layer w0.3: U100.34 v1(90.35,24.6)
  Bottom Layer w0.3: P100.5 81.609,16.434 82.359,16.434 84,18.075 86.5,18.075 87.825,19.4 87.825,21.7 89.475,23.35 89.475,23.725 v1(90.35,24.6)
SWL: J104.1 R109.2 | length 2.4
  Top Layer w0.3: R109.2 69.469,56.175 69.999,55.645 J104.1
SWR: J105.3 R117.2 | length 3.8
  Top Layer w0.3: R117.2 67.93,32.85 69.923,30.857 69.923,30.277 J105.3
USB_D_N: R103.2 U100.32 | length 4.8
  Top Layer w0.269: R103.2 86.411,26.754 86.645,26.754 86.931,27.039 86.961,27.039 87.286,27.363 89.023,27.363 90.239,26.147 U100.32
USB_D_P: R102.2 U100.33 | length 3.9
  Top Layer w0.269: R102.2 87.079,26.086 87.079,26.32 87.364,26.606 87.364,26.636 87.521,26.794 88.841,26.794 89.864,25.771 U100.33
pads on no net: J100.A8 J100.B8 J101.0 J101.3 J102.0 J102.3 J103.0 J104.0 J104.3 J105.0 J105.1 U100.2 U100.3 U100.4 U100.14 U100.15 U100.16 U100.17 U100.20 U100.27 U100.28 U100.29 U100.30 U100.31 U100.38 U100.39 U100.40

## Polygon pours and split planes (outlines as drawn)
GND on Bottom Layer "GND_L04_P022" (solid, remove dead copper, pour order 22): 55.802,21.645 71.948,21.645 71.948,40.645 55.758,40.645
GND on Bottom Layer "GND_L04_P012" (solid, remove dead copper, pour order 12): 74.775,38.15 111.625,38.15 111.625,10.025 74.775,10.025
GND on Bottom Layer "GND_L04_P018" (solid, remove dead copper, pour order 18): 71.802,44.645 55.655,44.645 55.655,63.645 71.845,63.645
GND on Bottom Layer "GND_L04_P026" (solid, remove dead copper, pour order 26): 75.8,66.15 105.825,66.15 105.825,42.15 75.8,42.15
GND on Bottom Layer "Main" (solid, remove dead copper, pour order 31): 81.125,18.975 90.75,18.975 91.775,17.95 91.78,17.955 92.254,17.955 98.7,24.402 98.7,27.825 81.125,27.825
3V3 on Bottom Layer "Main" (solid, remove dead copper, pour order 10): 96.25,23.925 96.05,24.125 94.375,24.125 94.375,21.175 98,17.55 101.125,17.55 101.5,17.925 101.5,23.3 100.875,23.925 100.875,25.45 100.125,26.2 98.7,26.2 98.7,24.625 98,23.925
5V on Bottom Layer "Main" (solid, remove dead copper, pour order 9): 94.45,29.575 95.875,31 96.475,31 96.475,29.575 96.475,26.3 95.875,26.3 94.775,27.4 89.725,27.4 88.825,28.3 86.5,28.3 86.5,30 89.6,30 89.6,29.575
5V on Bottom Layer "Main" (solid, remove dead copper, pour order 6): 95.875,31 97.825,31 102.475,26.35 102.475,23.15 101.8,23.15 101,23.95 101,25.525 100.225,26.3 95.875,26.3
7.4V on Bottom Layer "Main" (solid, remove dead copper, pour order 7): 89.775,29.775 92.65,29.775 92.65,36.025 92.2,36.475 91.125,36.475 90.65,36 90.65,32.025 89.775,31.15 89.775,30.4
BAT_+ on Bottom Layer "Main" (solid, remove dead copper, pour order 8): 82.125,33.55 85.2,33.55 85.8,32.95 85.8,31.475 89.725,31.475 90.2,31.95 90.2,38.15 82.125,38.15
GND on Top Layer "GND_L01_P023" (solid, remove dead copper, pour order 23): 55.802,21.645 71.948,21.645 71.948,40.645 55.758,40.645
GND on Top Layer "GND_L01_P013" (solid, remove dead copper, pour order 13): 74.775,38.15 111.625,38.15 111.625,10.025 74.775,10.025
GND on Top Layer "GND_L01_P019" (solid, remove dead copper, pour order 19): 71.802,44.645 55.655,44.645 55.655,63.645 71.845,63.645
GND on Top Layer "GND_L01_P027" (solid, remove dead copper, pour order 27): 75.8,66.15 105.825,66.15 105.825,42.15 75.8,42.15
GND on Top Layer "Main" (solid, remove dead copper, pour order 30): 92.725,19.725 91.55,18.55 91.55,17.58 93.785,15.344 94.449,16.008 94.449,16.476 92.725,18.2 93.488,18.962
GND on Top Layer "Main" (solid, remove dead copper, pour order 29): 80.85,27.379 83.85,27.379 83.85,26.15 80.85,26.15
GND on Top Layer "Main" (solid, remove dead copper, pour order 28): 83.634,21.775 82.914,21.055 81.353,21.055 80.645,21.762 80.645,19.925 85.35,19.925 85.35,21.775
BAT_+ on Top Layer "Main" (solid, remove dead copper, pour order 4): 90.2,31.95 89.725,31.475 86.275,31.475 84.65,33.1 82.125,33.1 82.125,38.15 90.2,38.15
7.4V on Top Layer "Main" (solid, remove dead copper, pour order 5): 91.475,30.475 91.475,29.625 89.95,29.625 89.95,31.325 90.475,31.85 90.475,38.15 99.1,38.15 99.1,34.95 97.5,33.35 94.35,33.35
GND on Bottom Inner Layer "GND_L03_P021" (solid, remove dead copper, pour order 21): 55.802,21.645 71.948,21.645 71.948,40.645 55.758,40.645
GND on Bottom Inner Layer "GND_L03_P015" (solid, remove dead copper, pour order 15): 74.775,38.15 111.625,38.15 111.625,10.025 74.775,10.025